# EAGLE board Connector Board rev3 (EAGLE 9.6.2)
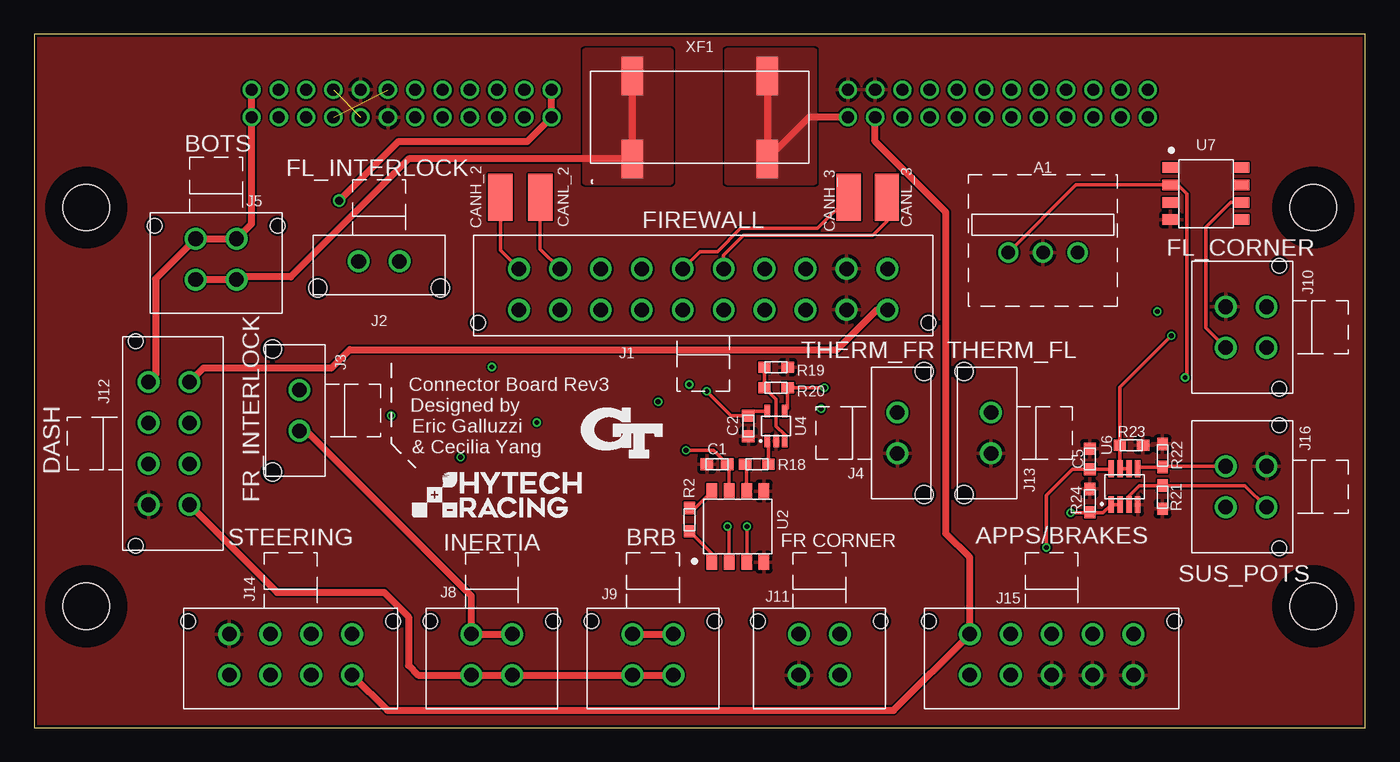
[diagram p0: board, top side]
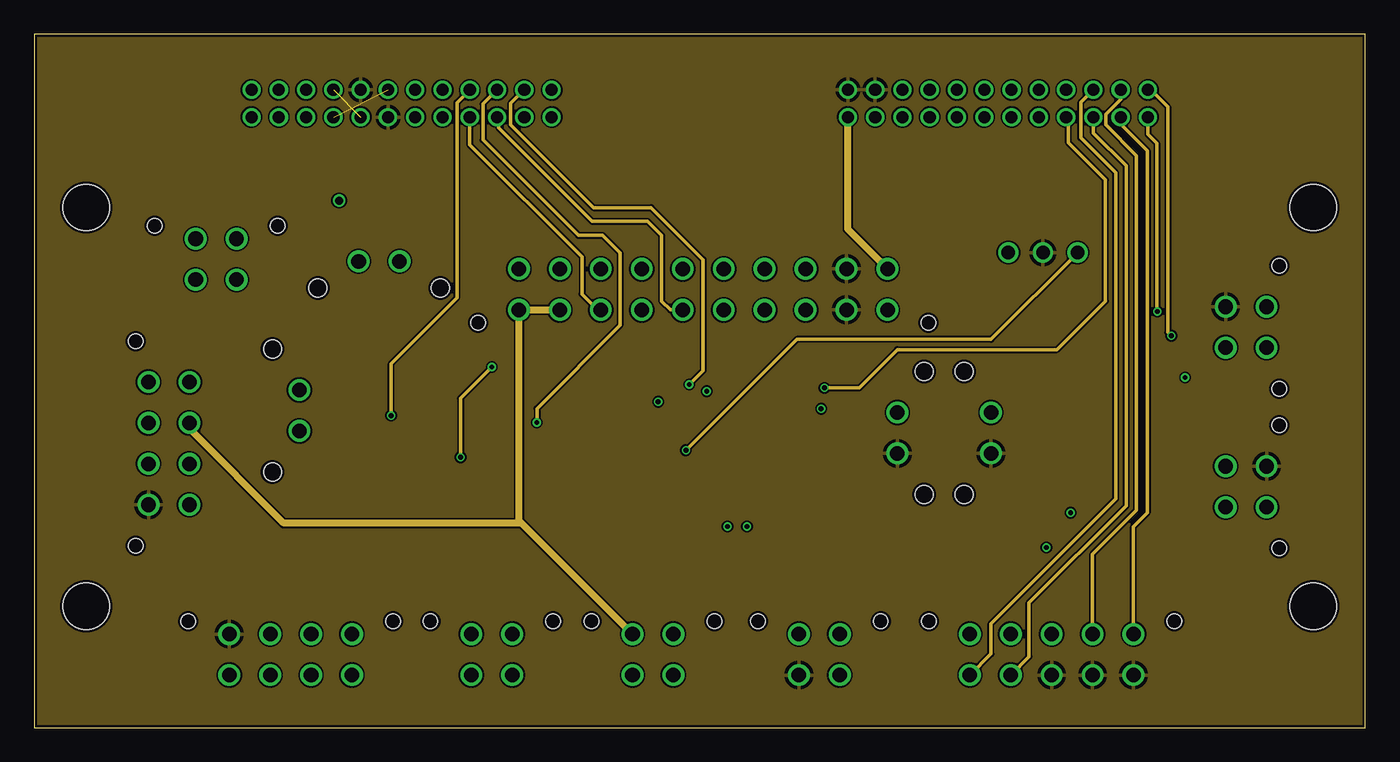
[diagram p1: board, inner layer Route2]
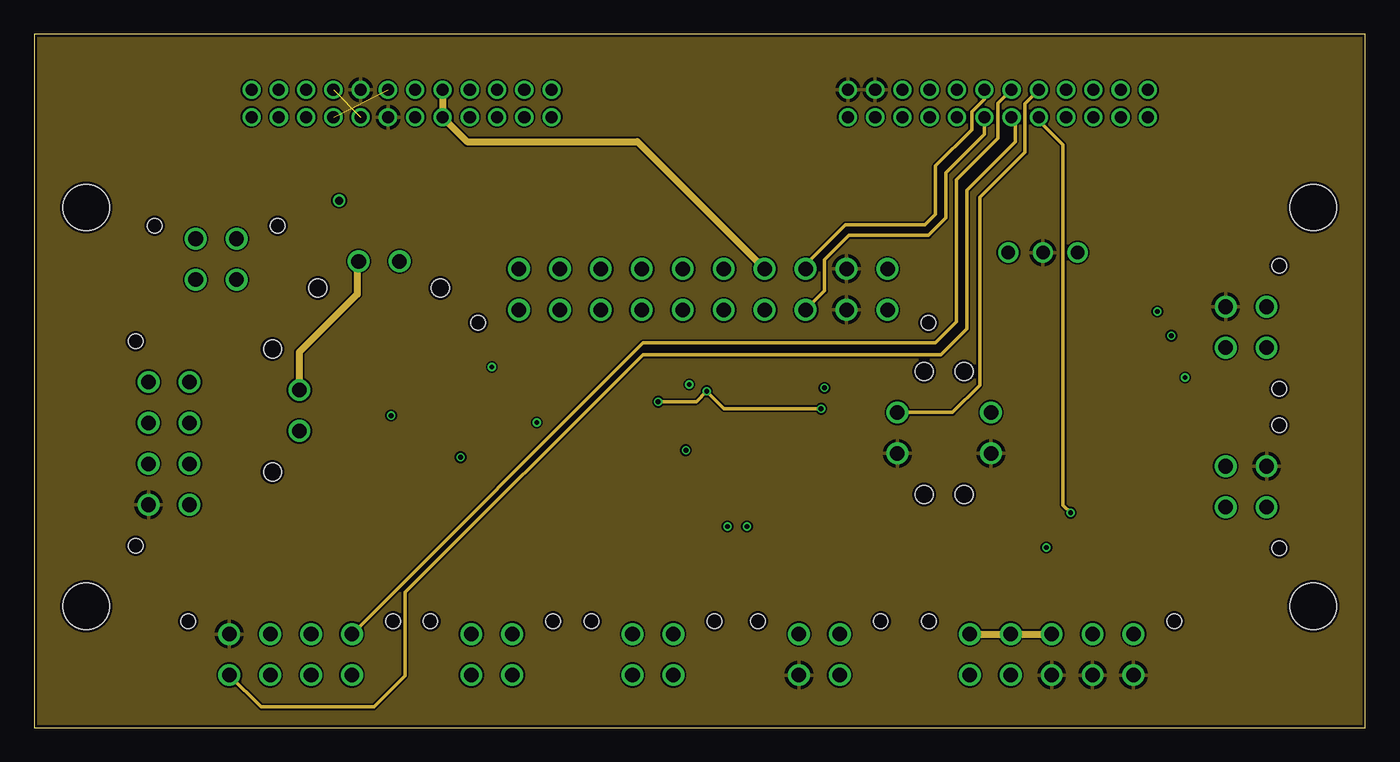
[diagram p2: board, inner layer Route15]
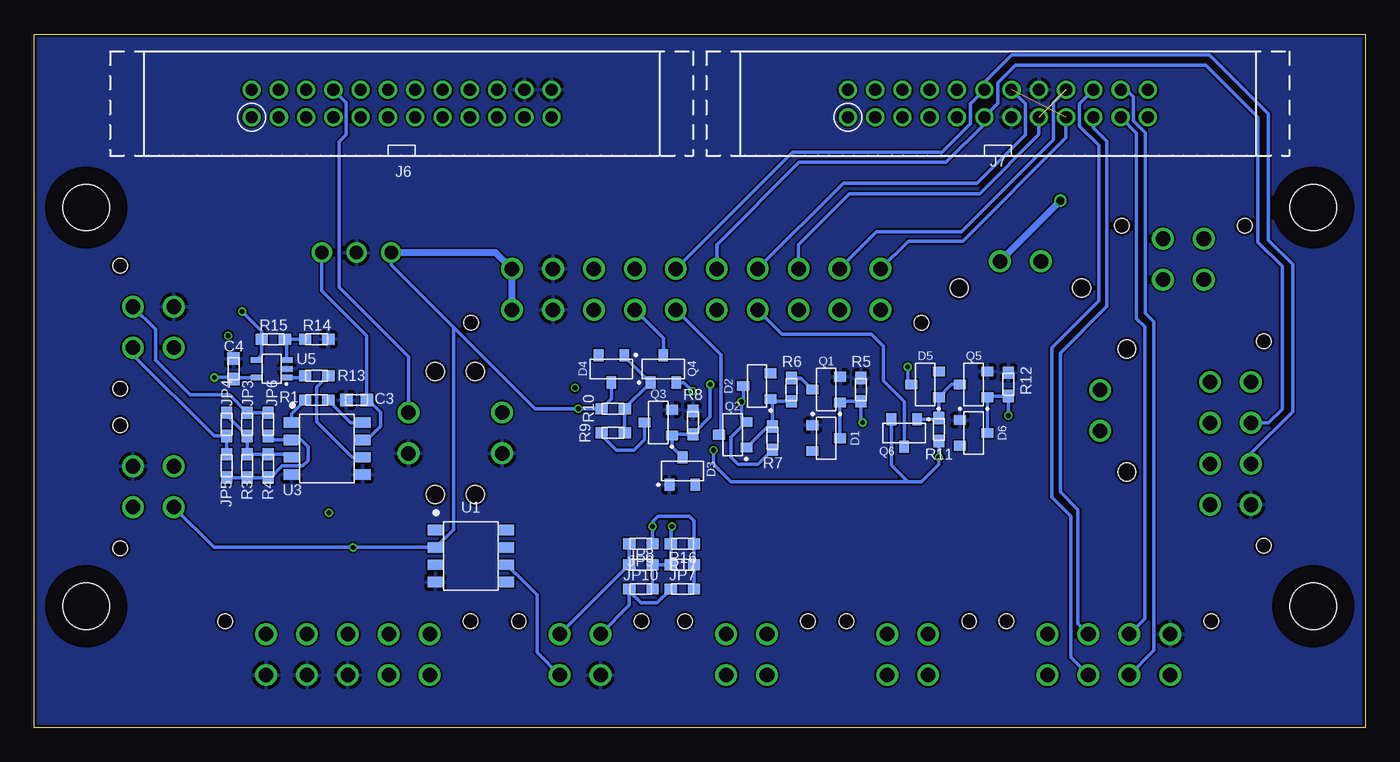
[diagram p3: board, bottom side, seen from below]

Size 97.54 x 50.8 mm. Coordinates in mm from the lower left corner, seen from the top.
Outline: 0,0 97.54,0 97.54,50.8 0,50.8 0,0
Copper layers (1+2*15+16): Top 0.035mm / dielectric 0.2mm / Route2 0.0175mm / dielectric 1.065mm / Route15 0.0175mm / dielectric 0.2mm / Bottom 0.035mm
Design rules "JLCPCB (4 Layer)": minimum track width 5mil, minimum drill 0.2mm, track to track 5mil, track to pad 5mil, pad to pad 5mil, via to via 20mil, smd to smd 5mil, copper to edge 0.2mm, drill to drill 21mil, minimum pad ring 6mil, minimum via ring 5mil, stop-mask expansion 2mil, vias tented up to drill 30mil, thermal gap 10mil
Net classes: 1 diff pairs: width 0.254 mm

## Footprints (pad centres in the part's own frame; a part is rotated, then mirrored left to right if it is on the bottom)
OKI-78SR = drill 0.991: 1 -2.54,0; 2 0,0; 3 2.54,0
0603-CAP = smd 0.9 x 0.9: 1 -0.75,0; 2 0.75,0
5015 = smd 3.429 x 1.778: 1 0,0
SOT-23 = smd 0.711 x 0.889: 1 -0.94,-1.003; 2 0.94,-1.003; 3 0,1.003
MOLEX_MICROFIT_PTH_VERTICAL_20_DUAL = drill 1.067: 1 13.5,-3; 2 10.5,-3; 3 7.5,-3; 4 4.5,-3; 5 1.5,-3; 6 -1.5,-3; 7 -4.5,-3; 8 -7.5,-3; 9 -10.5,-3; 10 -13.5,-3; 11 13.5,0; 12 10.5,0; 13 7.5,0; 14 4.5,0; 15 1.5,0; 16 -1.5,0; 17 -4.5,0; 18 -7.5,0; 19 -10.5,0; 20 -13.5,0 | hole 1.067: 16.5,0.94; -16.5,0.94
MOLEX_MICROFIT_PTH_VERTICAL_02_SINGLE = drill 1.067: 1 1.499,0; 2 -1.499,0 | hole 1.321: 4.496,-1.956; -4.496,-1.956
MOLEX_MICROFIT_PTH_VERTICAL_04_DUAL = drill 1.067: 1 1.499,-2.997; 2 -1.499,-2.997; 3 1.499,0; 4 -1.499,0 | hole 1.067: 4.496,0.94; -4.496,0.94
EHT-112-01 = drill 0.889: 1 -10.994,-0.999; 2 -10.994,0.999; 3 -8.995,-0.999; 4 -8.995,0.999; 5 -6.996,-0.999; 6 -6.996,0.999; 7 -4.997,-0.999; 8 -4.997,0.999; 9 -2.998,-0.999; 10 -2.998,0.999; 11 -0.999,-0.999; 12 -0.999,0.999; 13 0.999,-0.999; 14 0.999,0.999; 15 2.998,-0.999; 16 2.998,0.999; 17 4.997,-0.999; 18 4.997,0.999; 19 6.996,-0.999; 20 6.996,0.999; 21 8.995,-0.999; 22 8.995,0.999; 23 10.994,-0.999; 24 10.994,0.999
MOLEX_MICROFIT_PTH_VERTICAL_08_DUAL = drill 1.067: 1 4.496,-2.997; 2 1.499,-2.997; 3 -1.499,-2.997; 4 -4.496,-2.997; 5 4.496,0; 6 1.499,0; 7 -1.499,0; 8 -4.496,0 | hole 1.067: 7.493,0.94; -7.493,0.94
MOLEX_MICROFIT_PTH_VERTICAL_10_DUAL = drill 1.067: 1 5.994,-2.997; 2 2.997,-2.997; 3 0,-2.997; 4 -2.997,-2.997; 5 -5.994,-2.997; 6 5.994,0; 7 2.997,0; 8 0,0; 9 -2.997,0; 10 -5.994,0 | hole 1.067: 8.992,0.94; -8.992,0.94
0603-RES = smd 0.9 x 0.8: 1 -0.85,0; 2 0.85,0
SOIC-08(NARROW,0.15") = smd 0.762 x 1.143: 1 -1.905,-2.603; 2 -0.635,-2.603; 3 0.635,-2.603; 4 1.905,-2.603; 5 1.905,2.603; 6 0.635,2.603; 7 -0.635,2.603; 8 -1.905,2.603
SC-70-5 = smd 0.4 x 0.9: 1 -0.65,-1.1; 2 0,-1.1; 3 0.65,-1.1; 4 0.65,1.1; 5 -0.65,1.1
SOT-23-8 = smd 0.4 x 1.22: 1 -0.975,-1.31; 2 -0.325,-1.31; 3 0.325,-1.31; 4 0.975,-1.31; 5 0.975,1.31; 6 0.325,1.31; 7 -0.325,1.31; 8 -0.975,1.31
MOUNTING_M3 = hole 3.4: 0,0
3588 = smd 1.575 x 2.819: 1 -4.953,3.035; 2 -4.953,-3.035; 3 4.953,-3.035; 4 4.953,3.035

## Placement (x,y rotation side)
A1  VOLTAGE_REGULATOR_MODULE_OKI-78SR_12V  [OKI-78SR]  73.91,34.8 0 top
C1  CAPACITOR_0603_50V_0.1UF  [0603-CAP]  50.04,19.3 180 top
C2  CAPACITOR_0603_50V_0.1UF  [0603-CAP]  52.32,22.1 270 top
C3  CAPACITOR_0603_50V_0.1UF  [0603-CAP]  73.91,24 180 bottom
C4  CAPACITOR_0603_50V_0.1UF  [0603-CAP]  82.93,26.29 90 bottom
C5  CAPACITOR_0603_50V_0.1UF  [0603-CAP]  77.34,19.68 90 top
CANH_2  TEST_POINT  [5015]  34.16,38.86 90 top
CANH_3  TEST_POINT  [5015]  59.69,38.86 90 top
CANL_2  TEST_POINT  [5015]  37.08,38.86 270 top
CANL_3  TEST_POINT  [5015]  62.48,38.86 270 top
D1  TVS__15V  [SOT-23]  39.5,21.21 270 bottom
D2  TVS__15V  [SOT-23]  44.58,25.02 90 bottom
D3  TVS__15V  [SOT-23]  50.04,18.8 0 bottom
D4  TVS__15V  [SOT-23]  55.24,26.29 180 bottom
D5  TVS__15V  [SOT-23]  32.26,25.15 90 bottom
D6  TVS__15V  [SOT-23]  28.7,21.59 270 bottom
J1  CONNECTOR-20_MF_T_V_  [MOLEX_MICROFIT_PTH_VERTICAL_20_DUAL]  49.02,30.61 180 top
J2  CONNECTOR-2_MF_T_V_  [MOLEX_MICROFIT_PTH_VERTICAL_02_SINGLE]  25.27,34.16 0 top
J3  CONNECTOR-2_MF_T_V_  [MOLEX_MICROFIT_PTH_VERTICAL_02_SINGLE]  19.43,23.24 270 top
J4  CONNECTOR-2_MF_T_V_  [MOLEX_MICROFIT_PTH_VERTICAL_02_SINGLE]  63.25,21.59 90 top
J5  CONNECTOR-4_μF_T_V_BLACK  [MOLEX_MICROFIT_PTH_VERTICAL_04_DUAL]  13.34,35.81 0 top
J6  CONNECTOR-24_CONNECTOR-24_  [EHT-112-01]  70.61,45.72 0 bottom
J7  CONNECTOR-24_CONNECTOR-24_  [EHT-112-01]  26.92,45.72 0 bottom
J8  CONNECTOR-4_μF_T_V_BLACK  [MOLEX_MICROFIT_PTH_VERTICAL_04_DUAL]  33.53,6.86 0 top
J9  CONNECTOR-4_μF_T_V_BLACK  [MOLEX_MICROFIT_PTH_VERTICAL_04_DUAL]  45.34,6.86 0 top
J10  CONNECTOR-4_μF_T_V_BLACK  [MOLEX_MICROFIT_PTH_VERTICAL_04_DUAL]  90.3,29.34 270 top
J11  CONNECTOR-4_μF_T_V_BLACK  [MOLEX_MICROFIT_PTH_VERTICAL_04_DUAL]  57.53,6.86 0 top
J12  CONNECTOR-8_μF_T_V_BLACK  [MOLEX_MICROFIT_PTH_VERTICAL_08_DUAL]  8.38,20.83 90 top
J13  CONNECTOR-2_MF_T_V_  [MOLEX_MICROFIT_PTH_VERTICAL_02_SINGLE]  70.1,21.59 270 top
J14  CONNECTOR-8_μF_T_V_BLACK  [MOLEX_MICROFIT_PTH_VERTICAL_08_DUAL]  18.8,6.86 0 top
J15  CONNECTOR-10_MF_T_V_  [MOLEX_MICROFIT_PTH_VERTICAL_10_DUAL]  74.55,6.86 0 top
J16  CONNECTOR-4_μF_T_V_BLACK  [MOLEX_MICROFIT_PTH_VERTICAL_04_DUAL]  90.3,17.65 270 top
JP3  JUMPER_0603_  [0603-RES]  81.92,22.23 270 bottom
JP4  JUMPER_0603_  [0603-RES]  83.44,22.23 270 bottom
JP5  JUMPER_0603_  [0603-RES]  83.44,19.18 90 bottom
JP6  JUMPER_0603_  [0603-RES]  80.39,22.23 270 bottom
JP7  JUMPER_0603_  [0603-RES]  50.04,10.16 0 bottom
JP8  JUMPER_0603_  [0603-RES]  53.09,13.46 180 bottom
JP9  JUMPER_0603_  [0603-RES]  53.09,11.94 180 bottom
JP10  JUMPER_0603_  [0603-RES]  53.09,10.16 0 bottom
Q1  TRANSISTOR_N_MOS__DMG3406L-7  [SOT-23]  39.5,24.77 90 bottom
Q2  TRANSISTOR_P_MOS_SOT-23_DMP3056L-7  [SOT-23]  46.35,21.46 90 bottom
Q3  TRANSISTOR_N_MOS__DMG3406L-7  [SOT-23]  51.82,22.35 90 bottom
Q4  TRANSISTOR_P_MOS_SOT-23_DMP3056L-7  [SOT-23]  51.44,26.29 0 bottom
Q5  TRANSISTOR_N_MOS__DMG3406L-7  [SOT-23]  28.7,25.15 90 bottom
Q6  TRANSISTOR_P_MOS_SOT-23_DMP3056L-7  [SOT-23]  33.78,21.59 180 bottom
R1  RESISTOR_0603_2.74K  [0603-RES]  76.83,24 0 bottom
R2  RESISTOR_0603_2.74K  [0603-RES]  48.01,15.24 90 top
R3  RESISTOR_0603_DNP  [0603-RES]  81.92,19.18 90 bottom
R4  RESISTOR_0603_1.5M  [0603-RES]  80.39,19.18 90 bottom
R5  RESISTOR_0603_10K  [0603-RES]  36.96,24.77 270 bottom
R6  RESISTOR_0603_5.1K  [0603-RES]  42.04,24.77 270 bottom
R7  RESISTOR_0603_5.1K  [0603-RES]  43.43,21.21 270 bottom
R8  RESISTOR_0603_10K  [0603-RES]  49.28,22.35 270 bottom
R9  RESISTOR_0603_5.1K  [0603-RES]  55.12,21.59 0 bottom
R10  RESISTOR_0603_5.1K  [0603-RES]  55.12,23.37 180 bottom
R11  RESISTOR_0603_10K  [0603-RES]  31.24,21.84 270 bottom
R12  RESISTOR_0603_10K  [0603-RES]  26.16,25.15 270 bottom
R13  RESISTOR_0603_1K  [0603-RES]  76.83,25.78 180 bottom
R14  RESISTOR_0603_1K  [0603-RES]  76.83,28.45 180 bottom
R15  RESISTOR_0603_1K  [0603-RES]  80.01,28.45 180 bottom
R16  RESISTOR_0603_DNP  [0603-RES]  50.04,13.46 0 bottom
R17  RESISTOR_0603_1.5M  [0603-RES]  50.04,11.94 0 bottom
R18  RESISTOR_0603_1K  [0603-RES]  52.96,19.3 0 top
R19  RESISTOR_0603_1K  [0603-RES]  54.36,26.42 180 top
R20  RESISTOR_0603_1K  [0603-RES]  54.36,24.89 0 top
R21  RESISTOR_0603_1.5M  [0603-RES]  82.68,16.89 90 top
R22  RESISTOR_0603_1.5M  [0603-RES]  82.68,19.94 270 top
R23  RESISTOR_0603_30K  [0603-RES]  80.39,20.7 180 top
R24  RESISTOR_0603_30K  [0603-RES]  77.34,16.64 270 top
U1  VOLTAGE_REFERENCE_SOIC-8_10V  [SOIC-08(NARROW,0.15")]  65.53,12.57 270 bottom
U2  INA823DT  [SOIC-08(NARROW,0.15")]  51.56,14.73 0 top
U3  INA823DT  [SOIC-08(NARROW,0.15")]  76.07,20.45 270 bottom
U4  OPAMP_1_CHANNEL_OPA991  [SC-70-5]  54.36,22.1 0 top
U5  OPAMP_1_CHANNEL_OPA991  [SC-70-5]  80.14,26.29 90 bottom
U6  OPAMP_2_CHANNEL_OPA_2991  [SOT-23-8]  79.88,17.65 0 top
U7  VOLTAGE_REFERENCE_SOIC-8_10V  [SOIC-08(NARROW,0.15")]  85.85,39.12 270 top
U$2  [LOGO_GT_SMALL]  43.05,21.59 0 top
U$4  [MOUNTING_M3]  3.81,38.1 0 top
U$5  [MOUNTING_M3]  3.81,8.89 0 top
U$6  [MOUNTING_M3]  93.73,8.89 0 top
U$7  [MOUNTING_M3]  93.73,38.1 0 top
U$14  [LOGO_HYTECH_SMALL]  27.69,15.37 0 top
XF1  FUSE_HOLDER_MINIBLADESMD  [3588]  48.77,44.7 180 top

## Library data of the parts
A1 = HyTechDevices; DKPN: 811-3293-ND; MANUFACTURER: Murata Power Solutions Inc.; MOPN: 580-OKI78SR12/1W36C; MPN: OKI-78SR-12/1.0-W36-C
C1-C5 = HyTechDevices; CAPACITANCE: 0.1µF; DKPN: 311-1344-1-ND; MANUFACTURER: Yageo; MOPN: 603-CC603KRX7R9BB104; MPN: CC0603KRX7R9BB104; TOLERANCE: 10%; VOLTAGE: 50V
CANH_2 CANH_3 CANL_2 CANL_3 = HyTechDevices; DKPN: 36-5015CT-ND; MANUFACTURER: Keystone Electronics; MOPN: 534-5015; MPN: 5015
D1-D6 = HyTechDevices; DKPN: GSOT15-E3-08CT-ND; MANUFACTURER: Vishay General Semiconductor - Diodes Division; MOPN: 78-GSOT15-E3-08; MPN: GSOT15-E3-08; VOLTAGE: 15V
J1 = HyTechDevices; DKPN: WM10754-ND; MANUFACTURER: Molex; MOPN: 538-43045-2029; MPN: 0430452029
J2-J4 J13 = HyTechDevices - Copy; MANUFACTURER: MOLEX; MPN: 436500217
J5 J8-J11 J16 = HyTechDevices; DKPN: 2266-43045-0414-ND; MANUFACTURER: Molex; MOPN: 538-43045-0414; MPN: 430450414
J6 J7 = HyTechDevices; DKPN: EHT-112-01-F-D-ND; MANUFACTURER: Samtec; MOPN: 200-EHT11201FD; MPN: EHT-112-01-F-D
J12 J14 = HyTechDevices; DKPN: WM1798-ND; MANUFACTURER: Molex; MOPN: 538-43045-0814; MPN: 430450814
J15 = HyTechDevices; DKPN: WM1799-ND; MANUFACTURER: MOLEX; MOPN: 538-43045-1014; MPN: 430451014
JP3-JP10 = HyTechDevices; DKPN: 13-RC0603FR-130RLTR-ND; MANUFACTURER: YAGEO; MOPN: 603-RC0603FR-130RL; MPN: RC0603FR-130RL
Q1 Q3 Q5 = HyTechDevices; DKPN: DMG3406L-7DITR-ND; MANUFACTURER: Diodes Incorporated; MOPN: 621-DMG3406L-7; MPN: DMG3406L-7
Q2 Q4 Q6 = HyTechDevices; DKPN: DMP3056L-7DITR-ND; MANUFACTURER: Diodes Incorporated; MOPN: 621-DMP3056L-7; MPN: DMP3056L-7
R1 R2 = HyTechDevices; DKPN: P20020CT-ND; MANUFACTURER: Panasonic Electronic Components; MOPN: 667-ERJ-PB3B2741V; MPN: ERJ-PB3B2741V; POWER: 0.2W; RESISTANCE: 2.74k; TOLERANCE: 0.1%; VOLTAGE_CONTINUOUS: 23.41V; VOLTAGE_MAX: 150V
R3 R16 = HyTechDevices; RESISTANCE: DNP
R4 R17 R21 R22 = HyTechDevices; DKPN: 311-1.50MHRCT-ND; MANUFACTURER: Yageo; MOPN: 603-RC0603FR-071M5L; MPN: RC0603FR-071M5L; POWER: 0.1W; RESISTANCE: 1.5M; TOLERANCE: 1%; VOLTAGE_CONTINUOUS: 75V; VOLTAGE_MAX: 75V
R5 R8 R11 R12 = HyTechDevices; DKPN: P10KBDCT-ND; MANUFACTURER: Panasonic Electronic Components; MOPN: 667-ERA-3ARB103V; MPN: ERA-3ARB103V; POWER: 0.1W; RESISTANCE: 10k; TOLERANCE: 0.1%; VOLTAGE_CONTINUOUS: 31.62V; VOLTAGE_MAX: 75V
R6 R7 R9 R10 = HyTechDevices; DKPN: 311-5.10KHRTR-ND; MANUFACTURER: Yageo; MOPN: 603-RC0603FR-075K1L; MPN: RC0603FR-075K1L; POWER: 0.1W; RESISTANCE: 5.1k; TOLERANCE: 1%; VOLTAGE_CONTINUOUS: 22.58V; VOLTAGE_MAX: 75V
R13-R15 R18-R20 = HyTechDevices; DKPN: 1712-CPF-A-0603B1K0ETR-ND; MANUFACTURER: TE Connectivity Passive Product; MOPN: 279-CPF-A-0603B1K0E; MPN: CPF-A-0603B1K0E; POWER: 0.0625W; RESISTANCE: 1k; TOLERANCE: 0.1%; VOLTAGE_CONTINUOUS: 7.9V; VOLTAGE_MAX: 50V
R23 R24 = HyTechDevices; DKPN: P30KBDCT-ND; MANUFACTURER: Panasonic Electronic Components; MOPN: 667-ERA-3ARB303V; MPN: ERA-3ARB303V; POWER: 0.1W; RESISTANCE: 30k; TOLERANCE: 0.1%; VOLTAGE_CONTINUOUS: 54.77V; VOLTAGE_MAX: 75V
U1 U7 = HyTechDevices; DKPN: MAX6176AASA+-ND; MANUFACTURER: Maxim Integrated; MOPN: 700-MAX6176AASA; MPN: MAX6176AASA+
U2 U3 = HyTechDevices; DKPN: 296-INA823DTCT-ND; MANUFACTURER: Texas Instruments; MOPN: 595-INA823DT; MPN: INA823DT
U4 U5 = HyTechDevices; DKPN: 296-OPA991IDCKRCT-ND; MANUFACTURER: Texas Instruments; MOPN: 595-OPA991IDCKR; MPN: OPA991IDCKR
U6 = HyTechDevices; DKPN: 296-OPA2991IDDFRCT-ND; MANUFACTURER: Texas Instruments; MOPN: 595-OPA2991IDDFR; MPN: OPA2991IDDFR
U$2 U$4-U$7 U$14 = HyTechManufacturing
XF1 = HyTechDevices; DKPN: 36-3588-ND; FUSE_TYPE: MINI 297; MANUFACTURER: Keystone Electronics; MOPN: 534-3588; MPN: 3588

## Nets
10V_FL: J10.1 U7.6
10V_FR: J11.1 U1.6
+5V: J6.21 J14.1 J15.8 J15.9 J15.10
+12V: A1.3 C1.1 C3.1 D5.3 Q6.2 R11.2 U2.7 U3.7
+24V: A1.1 C2.1 C4.1 C5.1 D2.3 D4.3 J1.10 J1.20 J6.23 J12.1 J16.1 Q2.2 Q4.2 R7.2 R10.2 U1.2 U4.5 U5.5 U6.8 U7.2 XF1.1 XF1.2
ACCEL_1_EXT: J6.3 J15.6
ACCEL_2_EXT: J6.4 J15.7
BMS_OK: J1.15 J7.5
BRAKE_1_EXT: J6.5 J15.4
BRAKE_2_EXT: J6.6 J15.5
BRAKELIGHT_12V: J1.14 Q6.3
BRAKELIGHT_EN: D6.3 J7.8 Q5.1 R12.2
CANH_2: CANH_2.1 J1.1 J1.4 J7.14 J7.17
CANH_3: CANH_3.1 J1.5 J7.11 J12.6
CANL_2: CANL_2.1 J1.2 J1.3 J7.15 J7.18
CANL_3: CANL_3.1 J1.6 J7.12 J12.7
CURRENT_EXT: J1.18 J6.13
FL_CORNER_EXT: J6.1 R15.2 U5.4
FL_SIGNAL+: J10.4 JP3.1 JP6.1
FL_SIGNAL-: J10.3 JP4.2 JP5.2
FR_CORNER_EXT: J6.7 R20.2 U4.4
FR_SIGNAL+: J11.4 JP7.1 JP10.1
FR_SIGNAL-: J11.3 JP8.2 JP9.2
GND: A1.2 C1.2 C2.2 C3.2 C4.2 C5.2 D1.1 D3.1 D6.1 J1.9 J1.19 J4.2 J6.22 J6.24 J7.13 J7.16 J10.2 J11.2 J12.8 J13.1 J14.8 J15.1 J15.2 J15.3 J16.4 Q1.2 Q3.2 Q5.2 R5.1 R8.1 R12.1 R14.1 R19.1 R21.1 R22.1 R23.1 R24.1 U1.4 U2.4 U2.5 U3.4 U3.5 U4.2 U5.2 U6.4 U7.4
INERTIA_SENSE_EXT: J7.3
INVERTER_24V_EN: D1.3 J7.6 Q1.1 R5.2
INVERTER_24V_EN_BOOSTED: J1.16 Q2.3
INVERTER_EN: D3.3 J7.4 Q3.1 R8.2
INVERTER_EN_BOOSTED: J1.17 Q4.3
LATCH_BTN: J1.7 J7.9 J7.10
N$1: R1.1 U3.1
N$2: R1.2 U3.8
N$3: R13.1 U3.6
N$4: R13.2 U5.1
N$5: D2.1 Q2.1 R6.2 R7.1
N$6: JP3.2 JP4.1 R3.2 R4.2 U3.3
N$7: Q1.3 R6.1
N$8: D4.1 Q4.1 R9.2 R10.1
N$9: Q3.3 R9.1
N$11: D5.1 Q5.3 Q6.1 R11.1
N$13: R14.2 R15.1 U5.3
N$14: R2.1 U2.1
N$15: R2.2 U2.8
N$16: JP7.2 JP8.1 R16.2 R17.2 U2.3
N$18: JP5.1 JP6.2 R3.1 R4.1 U3.2
N$19: R19.2 R20.1 U4.3
N$23: R18.1 U2.6
N$24: R18.2 U4.1
N$25: JP9.1 JP10.2 R16.1 R17.1 U2.2
OKHS_IN: J1.13 J7.7
REFERENCE_EXT: J1.8 J6.14
SHDN_A: J5.1 J5.2 XF1.3 XF1.4
SHDN_B: J5.3 J5.4 J7.23 J7.24 J12.5
SHDN_G: J2.1 J7.1 J7.2
SHDN_H: J2.2 J3.2
SHDN_I: J3.1 J8.3 J8.4
SHDN_J: J8.1 J8.2 J9.1 J9.2 J12.4
SHDN_K: J1.11 J1.12 J9.3 J9.4 J12.2
STEERING_1_EXT: J6.11 J14.4
STEERING_2_EXT: J6.12 J14.5
STEERING_RX_N: J7.21 J14.7
STEERING_RX_P: J7.22 J14.3
STEERING_TX_N: J7.20 J14.2
STEERING_TX_P: J7.19 J14.6
SUS_POT_1_EXT: J6.2 R23.2 U6.6 U6.7
SUS_POT_1_PRE: J16.2 R22.2 U6.5
SUS_POT_2_EXT: J6.9 R24.2 U6.1 U6.2
SUS_POT_2_PRE: J16.3 R21.2 U6.3
THERM_FL_EXT: J6.8 J13.2
THERM_FR_EXT: J4.1 J6.10

## Tracks (layer width: path | path; a pad name or v marks a point on that pad's centre or on a via)
10V_FL
  Top 0.254: J10.1 85.85,29.29 85.85,36.64 87.69,38.48 U7.6
10V_FR
  Bottom 0.254: U1.6 62.29,11.3 62.25,11.3 60.71,9.76 60.71,5.54 J11.1
+5V
  Top 0.508: J6.21 61.62,42.94 66.8,37.76 66.8,14.22 68.56,12.47 J15.10 62.97,1.27 25.88,1.27 J14.1
  Route15 0.508: J15.10 J15.9 J15.8
+12V  (via drill 0.35)
  Top 0.254: C1.1 50.93,19.16 | 50.93,19.16 U2.7 | v47.75,20.32 49.78,20.32 50.93,19.18 50.93,19.16
  Route2 0.254: A1.3 70.1,28.45 55.88,28.45 v47.75,20.32 | v33.53,26.42 31.24,24.13 v31.24,19.81
  Bottom 0.254: A1.3 76.45,32 73.16,28.71 73.16,24.13 | 73.16,24.13 C3.1 | U3.7 73.15,21.08 72.14,22.1 72.14,23.1 73.16,24.13 | v47.75,20.32 47.75,19.3 46.48,18.03 33.53,18.03 | D5.3 33.53,25.41 v33.53,26.42 | 33.53,18.03 32.51,18.03 31.24,19.3 v31.24,19.81 R11.2 | 33.53,18.03 34.72,19.23 Q6.2
+24V  (via drill 0.35)
  Top 0.254: A1.1 76.33,39.75 U7.2 83.8,39.75 84.45,39.09 84.45,25.78 v84.33,25.65 | U4.5 52.67,23.2 C2.1 51.07,22.85 v49.28,24.64 | U6.8 78.88,18.93 C5.1 76.08,18.93 74.17,17.02 v74.17,13.21
  Top 0.508: XF1.2 XF1.1 56.77,44.72 J6.23 | J12.1 12.39,26.34 21.77,26.34 23.12,27.69 58.84,27.69 61.75,30.61 J1.20
  Route2 0.508: J1.10 59.62,36.51 J6.23
  Route15 0.254: v57.66,23.37 50.55,23.37 v49.28,24.64 48.51,23.88 v45.72,23.88
  Bottom 0.254: 66.8,29.34 71.37,33.91 A1.1 | 66.8,29.34 66.8,14.5 67.46,13.84 67.5,13.84 U1.2 v74.17,13.21 84.35,13.21 J16.1 | U5.5 82.83,25.64 C4.1 83.05,25.65 v84.33,25.65 | 66.8,29.34 60.83,23.37 v57.66,23.37 R10.2 55.24,24.09 D4.3 | Q4.2 49.92,25.29 v49.28,24.64 | D2.3 45.58,24.02 v45.72,23.88 45.72,22.77 Q2.2 46.48,21.27 46.48,19.81 45.97,19.3 44.49,19.3 R7.2
  Bottom 0.508: A1.1 63.71,34.8 J1.10 J1.20
  pour Top (no thermals): 50.8,49.53 50.8,40.01 57.15,40.01 57.15,49.53
ACCEL_1_EXT
  Route2 0.254: J15.6 80.54,14.73 81.56,15.75 81.56,42.26 79.61,44.21 J6.3
ACCEL_2_EXT
  Route2 0.254: J6.4 79.61,46.02 78.53,44.94 78.53,44.15 80.77,41.91 80.77,15.93 77.55,12.7 J15.7
BMS_OK
  Route2 0.254: J7.5 34.04,44.6 34.04,43.94 40.89,37.08 44.96,37.08 45.97,36.07 45.97,31.24 46.61,30.61 J1.15
BRAKE_1_EXT
  Route2 0.254: J15.4 72.9,5.21 72.9,9.14 80.01,16.26 80.01,41.15 77.61,43.55 J6.5
BRAKE_2_EXT
  Route2 0.254: J15.5 70.1,5.41 70.1,7.62 79.25,16.76 79.25,40.64 76.69,43.2 76.69,45.1 76.71,45.12 76.71,45.82 J6.6
BRAKELIGHT_12V
  Bottom 0.254: J1.14 42.74,28.83 36.2,28.83 35.31,27.94 35.31,25.4 33.78,23.88 Q6.3
BRAKELIGHT_EN  (via drill 0.35)
  Route2 0.254: v26.16,22.86 26.16,26.67 30.99,31.5 30.99,45.79 J7.8
  Bottom 0.254: D6.3 Q5.1 27.61,24.3 R12.2 v26.16,22.86
CANH_2  (1 unrouted)
  Top 0.254: J1.1 34.16,34.97 CANH_2.1
  Bottom 0.254: J1.4 38.25,39.88 28.45,39.88 24.89,43.43 24.89,45.69 J7.14 | J7.17 21.93,43.2 29.48,35.64 33.49,35.64 J1.1
CANH_3
  Top 0.254: CANH_3.1 57.4,36.58 51.76,36.58 50.06,34.88 48.79,34.88 J1.5
  Bottom 0.254: J1.5 47.52,35.38 41.51,41.4 30.73,41.4 27.92,44.21 J7.11 26.92,45.72 26.92,47.24 25.65,48.51 11.68,48.51 7.87,44.7 7.87,35.56 6.1,33.78 6.1,23.34 7.11,22.33 J12.6
CANL_2  (1 unrouted)
  Top 0.254: J1.2 37.08,35.05 CANL_2.1
  Bottom 0.254: J1.3 41.52,35.38 37.79,39.12 28.26,39.12 23.93,43.45 J7.15 | J7.18 22.86,45.79 22.86,43.06 29.59,36.32 35.81,36.32 J1.2
CANL_3
  Top 0.254: J1.6 50.52,34.62 51.97,36.07 61.47,36.07 62.48,37.08 CANL_3.1
  Bottom 0.254: J1.6 41.97,42.16 31.02,42.16 28.96,44.23 28.96,45.69 J7.12 27.92,47.26 25.91,49.28 11.43,49.28 7.11,44.96 7.11,35.71 5.33,33.93 5.33,23.14 8.38,20.09 J12.7
CURRENT_EXT
  Route15 0.254: J1.18 57.91,32 57.91,34.29 59.69,36.07 65.53,36.07 66.8,37.34 66.8,40.64 69.61,43.45 J6.13
FL_CORNER_EXT  (via drill 0.35)
  Route2 0.254: J6.1 81.61,43.45 82.24,42.82 82.24,30.54 v82.3,30.48
  Bottom 0.254: v82.3,30.48 80.86,29.04 R15.2 80.86,27.32 U5.4
FL_SIGNAL+
  Bottom 0.254: J10.4 88.65,29.18 88.65,26.92 86.11,24.38 83.22,24.38 JP3.1 JP6.1
FL_SIGNAL-
  Bottom 0.254: J10.3 90.3,27.33 84.34,21.38 83.57,21.38 | 83.57,21.38 JP4.2 | JP5.2 83.44,21.25 83.57,21.38
FR_CORNER_EXT  (via drill 0.35)
  Top 0.254: v57.91,24.89 R20.2 55.21,23.4 U4.4
  Route2 0.254: v57.91,24.89 60.45,24.89 63.25,27.69 74.93,27.69 78.49,31.24 78.49,40.13 75.79,42.83 75.79,44.54 J6.7
FR_SIGNAL+
  Bottom 0.254: J11.4 53.94,8.95 JP10.1 53.94,9.99 53.09,9.14 51.9,9.14 JP7.1
FR_SIGNAL-
  Bottom 0.254: JP8.2 JP9.2 J11.3
GND
  pour Top (rank 2): -1.27,51.44 -1.27,-0.13 99.06,-0.13 99.06,51.44
  pour Bottom: -2.54,52.7 -2.54,-0.64 100.33,-0.64 100.33,52.7
  pour Route15: -5.08,55.88 -5.08,-2.16 102.87,-2.16 102.87,55.88
  pour Route2: -3.81,54.61 -3.81,-1.27 101.6,-1.27 101.6,54.61
INVERTER_24V_EN  (via drill 0.35)
  Route2 0.254: J7.6 32.89,45.69 32.89,43.05 39.88,36.07 41.66,36.07 42.93,34.8 42.93,29.46 36.83,23.37 v36.83,22.35
  Bottom 0.254: D1.3 38.49,23.62 | 38.49,23.62 Q1.1 | 38.49,23.62 38.2,23.91 R5.2 36.96,22.48 v36.83,22.35
INVERTER_24V_EN_BOOSTED
  Bottom 0.254: Q2.3 47.22,21.6 47.22,27.3 J1.16
INVERTER_EN  (via drill 0.35)
  Route2 0.254: J7.4 34.92,45.73 34.92,44.16 40.98,38.1 45.21,38.1 49.02,34.29 49.02,26.16 v48.01,25.15
  Bottom 0.254: D3.3 50.81,20.57 Q3.1 50.72,21.5 R8.2 48.01,22.77 v48.01,25.15
INVERTER_EN_BOOSTED
  Bottom 0.254: J1.17 51.44,28.52 Q4.3
LATCH_BTN
  Route15 0.508: J7.10 J7.9 31.72,42.93 44.2,42.93 J1.7
N$1
  Bottom 0.254: R1.1 78.68,23.01 U3.1
N$2
  Bottom 0.254: R1.2 74.33,22.35 U3.8
N$3
  Bottom 0.254: U3.6 74.23,19.81 76.83,22.42 76.83,24.93 R13.1
N$4
  Bottom 0.254: R13.2 77.83,25.64 U5.1
N$5
  Bottom 0.254: Q2.1 43.82,22.06 R7.1 43.43,23.94 D2.1 43.41,23.91 R6.2
N$6
  Bottom 0.254: JP4.1 83.44,22.9 JP3.2 R3.2 R4.2 78.89,20.03 U3.3
N$7
  Bottom 0.254: Q1.3 41.35,25.61 R6.1
N$8
  Bottom 0.254: R9.2 R10.1 54.27,23.39 Q4.1 54.3,27.22 D4.1
N$9
  Bottom 0.254: Q3.3 52.82,21.09 53.59,20.32 54.86,20.32 55.97,21.42 R9.1
N$11
  Bottom 0.254: Q5.3 30.32,25.15 D5.1 31.24,24.19 R11.1 31.34,22.59 Q6.1
N$13
  Bottom 0.254: U5.3 79.04,28.32 R15.1 R14.2
N$14
  Top 0.254: R2.1 49.66,12.74 U2.1
N$15
  Top 0.254: R2.2 48.41,16.09 U2.8
N$16  (via drill 0.35)
  Top 0.254: v52.24,14.73 52.24,12.17 U2.3
  Bottom 0.254: JP7.2 R17.2 R16.2 49.19,15.15 49.53,15.49 51.82,15.49 52.24,15.07 v52.24,14.73 JP8.1
N$18
  Bottom 0.254: JP5.1 R3.1 81.92,18.5 81.74,18.33 80.52,18.33 R4.1 80.2,18.33 79.35,19.18 77.85,19.18 77.47,19.56 77.47,20.57 77.98,21.08 U3.2 80.1,21.08 JP6.2
N$19
  Top 0.254: U4.3 55.01,21.45 54.36,22.1 54.36,24.04 R20.1 R19.2
N$23
  Top 0.254: R18.1 52.2,19.22 U2.6
N$24
  Top 0.254: R18.2 53.81,20.89 U4.1
N$25  (via drill 0.35)
  Top 0.254: v50.8,14.73 50.93,14.61 U2.2
  Bottom 0.254: JP10.2 JP9.1 R17.1 R16.1 50.89,14.64 v50.8,14.73
OKHS_IN
  Route2 0.254: J7.7 31.92,42.69 40.13,34.48 40.13,31.75 41.27,30.61 J1.13
REFERENCE_EXT
  Route15 0.254: J1.8 56.52,33.92 59.44,36.83 65.28,36.83 66.04,37.59 66.04,41.15 68.69,43.8 68.69,45.1 69.61,46.02 J6.14
SHDN_A
  Top 0.508: XF1.3 XF1.4 43.8,41.66 27.43,41.66 18.8,33.02 15.04,33.02 J5.1 J5.2
  pour Top (no thermals): 40.39,49.53 40.39,40.01 46.61,40.01 46.61,49.53
SHDN_B
  Top 0.508: J7.24 J7.23 15.93,36.91 J5.3 J5.4 8.89,32.87 8.89,25.83 J12.5
SHDN_G  (via drill 0.6)
  Top 0.508: v22.35,38.61 26.67,42.93 36.12,42.93 J7.1 J7.2
  Bottom 0.508: v22.35,38.61 22.35,38.58 J2.1
SHDN_H
  Route15 0.508: J2.2 23.67,34.06 23.67,31.75 19.43,27.51 J3.2
SHDN_I
  Top 0.508: J3.1 19.94,21.74 32.03,9.65 J8.4 J8.3
SHDN_J
  Top 0.508: J9.1 J9.2 J8.1 J8.2 28.14,3.86 27.43,4.57 27.43,8.13 25.65,9.91 17.8,9.91 J12.4
SHDN_K
  Top 0.508: J9.4 J9.3
  Route2 0.508: J1.12 J1.11 35.52,15.18 J9.4 35.71,14.99 18.29,14.99 11.38,21.89 J12.2
STEERING_1_EXT
  Route15 0.254: J14.4 16.64,1.52 24.89,1.52 27.18,3.81 27.18,9.91 44.6,27.33 66.44,27.33 68.33,29.21 68.33,39.37 71.88,42.93 71.88,44.45 J6.11
STEERING_2_EXT
  Route15 0.254: J6.12 70.61,45.72 70.61,43.18 67.56,40.13 67.56,29.73 66.03,28.19 44.63,28.19 J14.5
STEERING_RX_N
  Bottom 0.254: J14.7 16.15,8 16.15,29.36 16.76,29.97 16.76,43.56 J7.21
STEERING_RX_P
  Bottom 0.254: J14.3 15.49,5.66 15.49,29.72 16.13,30.35 16.13,43.56 17.01,44.44 17.01,46.22 17.51,46.72 J7.22
STEERING_TX_N
  Bottom 0.254: J14.2 21.59,5.16 21.59,15.49 22.99,16.89 22.99,27.81 19.54,31.26 19.54,42.65 20.95,44.07 20.95,45.69 J7.20
STEERING_TX_P
  Bottom 0.254: J14.6 21.06,7.62 21.06,15.98 22.35,17.27 22.35,27.43 18.92,30.86 18.92,42.95 19.93,43.96 J7.19
SUS_POT_1_EXT  (via drill 0.35)
  Top 0.254: U6.6 U6.7 79.56,20.68 R23.2 79.54,24.93 v83.31,28.7
  Route2 0.254: v83.31,28.7 83.06,28.96 83.06,45.47 81.81,46.72 J6.2
SUS_POT_1_PRE
  Top 0.254: U6.5 80.98,19.09 R22.2 82.74,19.15 J16.2
SUS_POT_2_EXT  (via drill 0.35)
  Top 0.254: U6.2 U6.1 78.31,15.75 77.3,15.75 | R24.2 77.3,15.75 | 77.3,15.75 v75.95,15.75
  Route15 0.254: v75.95,15.75 75.39,16.31 75.39,42.69 73.61,44.47 J6.9
SUS_POT_2_PRE
  Top 0.254: U6.3 80.21,16.96 80.99,17.74 R21.2 88.71,17.74 J16.3
THERM_FL_EXT
  Bottom 0.254: J13.2 70.1,27.18 75.18,32.26 75.18,42.93 74.68,43.43 74.68,45.79 J6.8
THERM_FR_EXT
  Route15 0.254: J4.1 67.28,23.09 69.29,25.1 69.29,38.84 72.59,42.15 72.59,45.7 J6.10

## Text on the board
tPlace: BOTS | FL_INTERLOCK | FIREWALL | FL_CORNER | THERM_FR | THERM_FL | Connector Board Rev3 | FR_INTERLOCK | Designed by | Eric Galluzzi | DASH | & Cecilia Yang | STEERING | INERTIA | BRB | FR CORNER | APPS/BRAKES | SUS_POTS